# EAGLE board mboh opo (EAGLE 9.5.0)
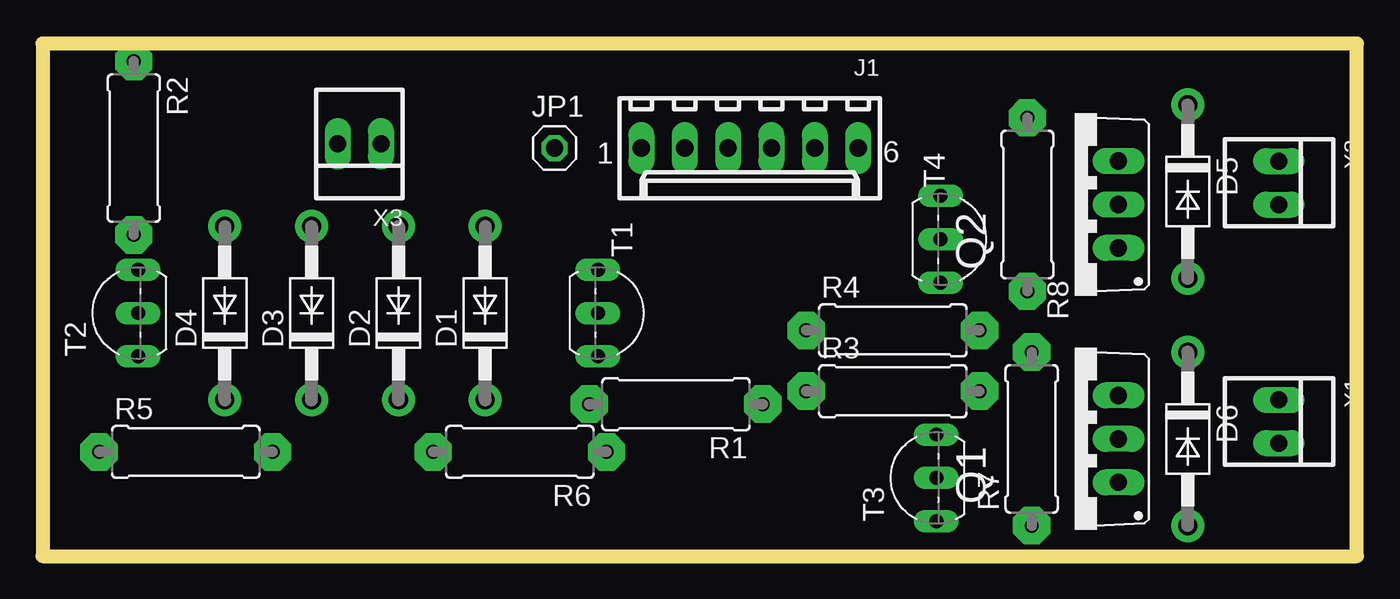
[diagram p0: board, top side]
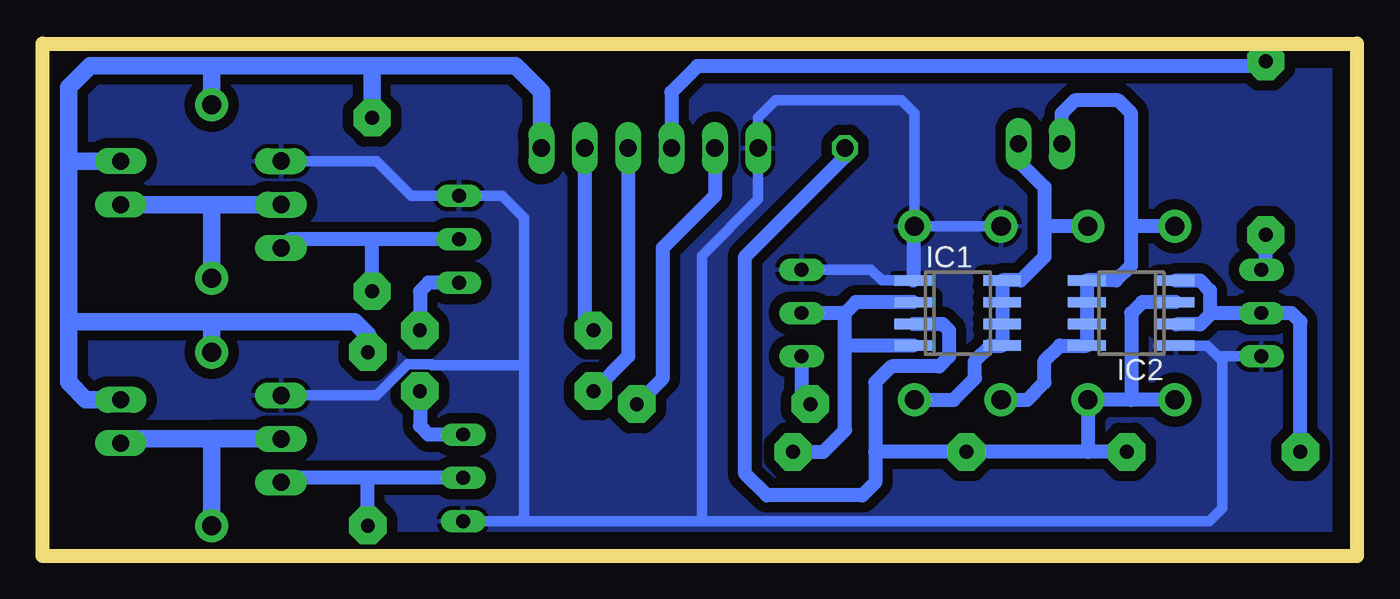
[diagram p1: board, bottom side, seen from below]

Size 76.95 x 30 mm. Coordinates in mm from the lower left corner, seen from the top.
Outline: 0,0 76.95,0 76.95,30 0,30 0,0
Copper layers (1*16): Top 0.035mm / dielectric 1.5mm / Bottom 0.035mm
Design rules "default": minimum track width 6mil, minimum drill 0.35mm, track to track 24mil, track to pad 24mil, pad to pad 24mil, via to via 24mil, smd to smd 24mil, copper to edge 40mil, drill to drill 6mil, minimum pad ring 10mil, minimum via ring 8mil, stop-mask expansion 4mil, vias tented up to drill 0mil, thermal gap 10mil

## Footprints (pad centres in the part's own frame; a part is rotated, then mirrored left to right if it is on the bottom)
DO41-10 = drill 1.118 pad 1.93: A 5.08,0; C -5.08,0
SO08 = smd 0.6 x 2.2: 1 -1.905,-2.6; 2 -0.635,-2.6; 3 0.635,-2.6; 4 1.905,-2.6; 5 1.905,2.6; 6 0.635,2.6; 7 -0.635,2.6; 8 -1.905,2.6
6410-06 = drill 1.016 long: 1 6.35,0; 2 3.81,0; 3 1.27,0; 4 -1.27,0; 5 -3.81,0; 6 -6.35,0
1X01 = drill 1.016 octagon: 1 0,0
TO220BV = drill 1.016 long: D 0,-2.54; G -2.54,-2.54; S 2.54,-2.54
0309/10 = drill 0.813 pad 2.184 octagon: 1 -5.08,0; 2 5.08,0
TO92-ECB = drill 0.813 long: B 2.54,0; C 0,0; E -2.54,0
22-23-2021 = drill 1 long: 1 -1.27,0; 2 1.27,0

## Placement (x,y rotation side)
D1  1N4004  [DO41-10]  25.91,14.22 90 top
D2  1N4004  [DO41-10]  20.83,14.22 90 top
D3  1N4004  [DO41-10]  15.75,14.22 90 top
D4  1N4004  [DO41-10]  10.67,14.22 90 top
D5  1N4004  [DO41-10]  67.06,21.34 270 top
D6  1N4004  [DO41-10]  67.06,6.86 270 top
IC1  LM555D  [SO08]  23.37,14.22 270 bottom
IC2  LM555D  [SO08]  13.21,14.22 90 bottom
J1  22-27-2061-06  [6410-06]  41.4,23.88 180 top
JP1  [1X01]  29.97,23.88 0 top
Q1  IRF530  [TO220BV]  60.45,6.86 90 top
Q2  IRF530  [TO220BV]  60.45,20.57 90 top
R1  150K  [0309/10]  37.08,8.89 180 top
R2  150K  [0309/10]  5.33,23.88 270 top
R3  150K  [0309/10]  49.78,9.65 0 top
R4  150K  [0309/10]  49.78,13.21 0 top
R5  68K  [0309/10]  8.38,6.1 0 top
R6  68K  [0309/10]  27.94,6.1 180 top
R7  47K  [0309/10]  57.91,6.86 90 top
R8  47K  [0309/10]  57.66,20.57 90 top
T1  2SC945  [TO92-ECB]  32.51,14.22 270 top
T2  2SC945  [TO92-ECB]  5.59,14.22 90 top
T3  2SC945  [TO92-ECB]  52.32,4.57 90 top
T4  2SC945  [TO92-ECB]  52.58,18.54 270 top
X1  22-23-2021  [22-23-2021]  72.39,7.87 270 top
X2  22-23-2021  [22-23-2021]  72.39,21.84 270 top
X3  22-23-2021  [22-23-2021]  18.54,24.13 180 top

## Library data of the parts
D1-D6 = diode
IC1 IC2 = linear
J1 = con-molex; MF: MOLEX; OC_FARNELL: unknown; OC_NEWARK: unknown
JP1 = pinhead
Q1 Q2 = transistor-power
R1-R8 = rcl; SPICEPREFIX: R
T1-T4 = transistor
X1-X3 = con-molex; MF: MOLEX; MPN: 22-23-2021; OC_FARNELL: 1462926; OC_NEWARK: 25C3832

## Nets
+12V: D3.C D4.C IC1.3 IC2.3 JP1.1 R5.2 R6.2
GND: D1.A D2.A IC1.1 IC2.1 J1.1 Q1.S Q2.S T1.E T2.E T3.E T4.E
M1: J1.4 R3.1
M2: J1.5 R4.1
N$1: R1.2 T1.B
N$2: R2.2 T2.B
N$3: IC2.2 IC2.4 R5.1 T2.C
N$4: IC1.2 IC1.4 R6.1 T1.C
N$5: R3.2 T3.B
N$6: D1.C D3.A IC1.5 IC1.6 IC1.7 IC1.8 X3.1
N$7: D2.C D4.A IC2.5 IC2.6 IC2.7 IC2.8 X3.2
N$8: R4.2 T4.B
N$9: Q1.G R7.1 T3.C
N$10: Q2.G R8.1 T4.C
N$11: D6.A Q1.D X1.2
N$13: D5.A Q2.D X2.2
N$16: J1.2 R1.1
N$17: J1.3 R2.1
VCC: D5.C D6.C J1.6 R7.2 R8.2 X1.1 X2.1

## Tracks (layer width: path | path; a pad name or v marks a point on that pad's centre or on a via)
+12V
  Bottom 0.61: 29.97,23.37 JP1.1
  Bottom 0.813: D4.C 13.21,9.14 | 13.21,9.14 D3.C 15.75,6.1 | IC2.3 12.57,14.86 13.21,14.22 13.21,9.14 | R5.2 15.75,6.1 | 15.75,6.1 R6.2 28.19,6.1 | IC1.3 24.26,13.59 23.88,13.21 23.88,11.68 24.45,11.11 27.25,11.11 28.19,10.16 28.19,6.1 | 29.97,23.37 35.81,17.53 35.81,4.83 34.54,3.56 28.96,3.56 28.19,4.32 28.19,6.1
GND
  Bottom 0.61: T2.E 8.13,11.68 | 8.13,11.68 8.76,12.32 IC2.1 | T1.E 28.45,16.76 27.81,16.13 IC1.1 | D2.A D1.A | D1.A 25.97,19.24 | 8.13,11.68 7.87,11.43 7.87,2.79 8.64,2.03 38.35,2.03 | 48.77,11.18 48.77,19.81 50.04,21.08 T4.E 55.37,21.08 57.4,23.11 Q2.S | 48.77,11.18 48.77,2.29 49.02,2.03 | 49.02,2.03 T3.E | Q1.S 57.4,9.4 55.57,11.23 54.21,11.23 54.16,11.18 48.77,11.18 | 38.35,2.03 38.35,17.59 35.05,20.89 J1.1 35.05,25.65 34.04,26.67 26.67,26.67 25.91,25.91 D1.A | 38.35,2.03 49.02,2.03
  Bottom 0.813: 25.97,19.24 IC1.1
  pour Bottom: 0.76,29.97 76.96,29.97 76.96,0 0.76,0
M1
  Bottom 0.813: J1.4 42.67,11.68 R3.1
M2
  Bottom 0.61: 45.21,13.72 R4.1
  Bottom 0.813: J1.5 45.21,13.72
N$1
  Bottom 0.813: T1.B 32.51,9.4 R1.2
N$2
  Bottom 0.813: T2.B 5.33,17.02 R2.2
N$3
  Bottom 0.61: 10.58,13.56 IC2.2 | 8.59,14.31 8.51,14.22
  Bottom 0.813: 10.58,13.56 9.17,13.56 8.51,14.22 T2.C 3.81,14.22 3.3,13.72 R5.1 | 8.59,14.31 8.59,15.54 9.19,16.13 IC2.4
N$4
  Bottom 0.61: 29.84,12.32 29.97,12.45
  Bottom 0.813: R6.1 31.24,6.1 29.97,7.37 29.97,12.45 29.97,14.22 | IC1.2 29.34,14.86 29.97,14.22 | 29.97,14.22 T1.C | IC1.4 29.84,12.32
N$5
  Bottom 0.813: R3.2 54.86,7.62 54.36,7.11 T3.B
N$6
  Bottom 0.813: D1.C 23.62,9.14 22.35,10.41 22.35,11.43 21.46,12.32 IC1.5 IC1.6 IC1.7 IC1.8 19.69,16.13 18.29,17.53 18.29,19.3 | X3.1 19.81,23.11 18.29,21.59 18.29,19.3 | D3.A 18.29,19.3
N$7
  Bottom 0.813: D2.C 19.3,9.14 18.29,10.16 18.29,11.43 17.4,12.32 IC2.8 IC2.7 IC2.6 IC2.5 14.1,16.13 13.21,17.02 13.21,19.3 | X3.2 17.27,25.91 16.51,26.67 13.97,26.67 13.21,25.91 13.21,19.3 | D4.A 13.21,19.3
N$8
  Bottom 0.813: T4.B 54.36,16 54.86,15.49 R4.2
N$9
  Bottom 0.61: 62.74,4.57 Q1.G
  Bottom 0.813: T3.C 57.91,4.57 | 57.91,4.57 62.74,4.57 | R7.1 57.91,4.57
N$10
  Bottom 0.61: 62.48,18.54 Q2.G
  Bottom 0.813: T4.C 57.66,18.54 | 57.66,18.54 62.48,18.54 | R8.1 57.66,18.54
N$11
  Bottom 0.813: 72.14,6.86 X1.2
  Bottom 1.016: 72.14,6.86 67.06,6.86 | Q1.D 67.06,6.86 | 67.06,6.86 D6.A
N$13
  Bottom 1.016: Q2.D 67.06,20.57 | 67.06,20.57 X2.2 | D5.A 67.06,20.57
N$16
  Bottom 0.813: J1.2 37.59,21.08 40.64,18.03 40.64,10.41 R1.1
N$17
  Bottom 0.813: R2.1 5.61,28.68 38.61,28.68 40.13,27.16 J1.3
VCC
  Bottom 0.61: 57.66,28.45 57.91,28.7
  Bottom 1.016: J1.6 47.75,27.18 49.28,28.7 57.91,28.7 67.06,28.7 | D5.C 67.06,28.7 | R8.2 57.66,28.45 | R7.2 57.91,12.95 58.67,13.72 67.06,13.72 | X1.1 74.42,9.14 75.44,10.16 75.44,13.72 | 67.06,28.7 74.17,28.7 75.44,27.43 75.44,23.11 | 75.44,23.11 75.44,13.72 | 67.06,13.72 75.44,13.72 | D6.C 67.06,13.72 | X2.1 75.44,23.11